# Altium PCB PCB_涂鸦CBU开发板_2021-05-29.pcbdoc
Units mil, origin at the board's own origin, x right, y up, seen from the top; angles counter-clockwise.
Board outline 3416.96 x 3968.5 mil, 2 copper layers (Top Layer, Bottom Layer); 20 components, 31 nets, 116 pads, 23 vias.
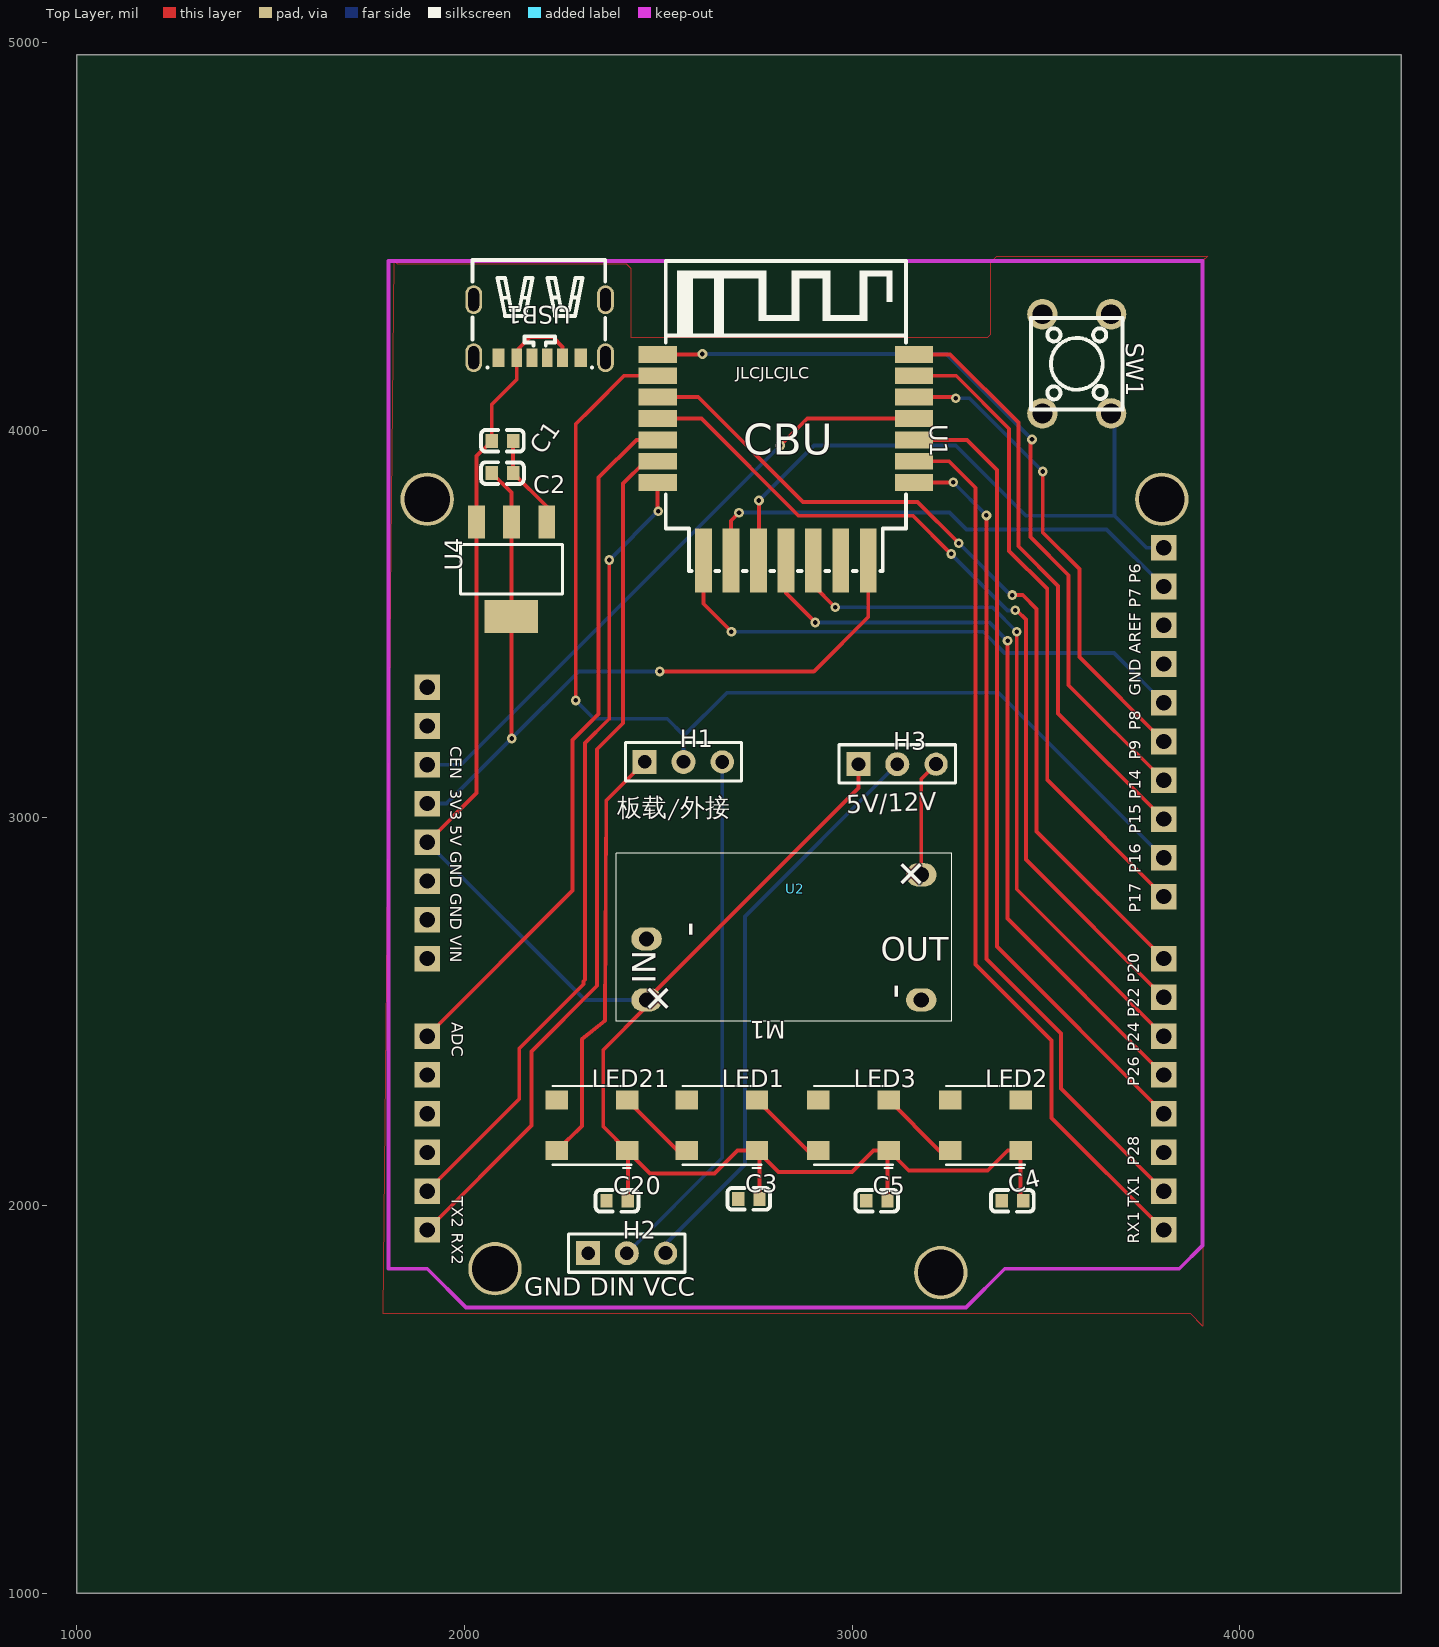
[diagram p0: Top Layer view]
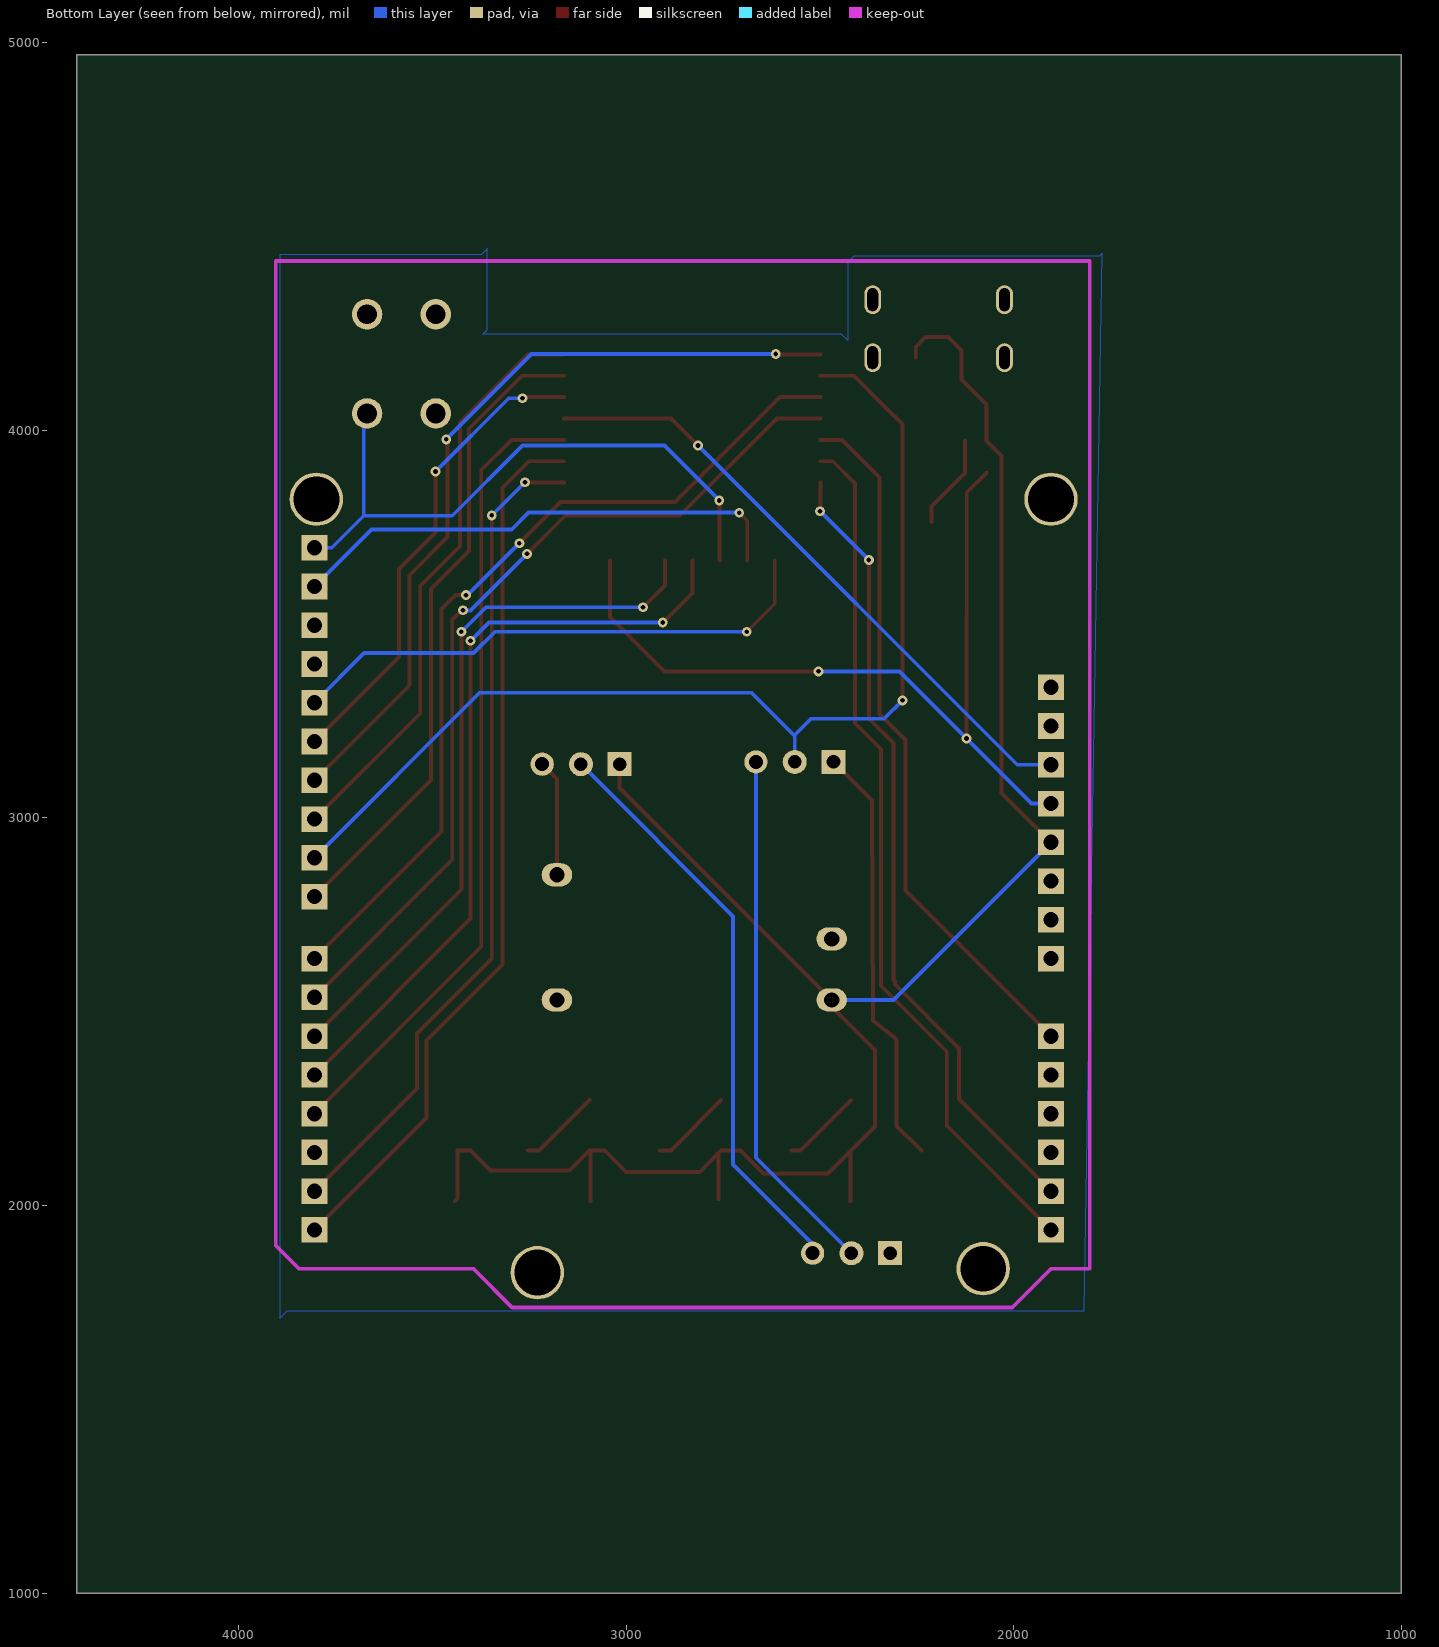
[diagram p1: Bottom Layer view, seen from below]

## Layer stack, top to bottom
Top Layer: signal copper (thickness not stored)
Dielectric: dielectric 12.6, FR-4, Dk 4.8
Bottom Layer: signal copper (thickness not stored)

## Board outline
4416.96,1000 1000,1000 1000,4968.5 4416.96,4968.5

## Components (designator, comment, footprint, x,y, rotation, side; value= is the part's Value field where it differs from the comment)
C1 "10uF" C0603 2098.06,3972.44 r0 top
C2 "10uF" C0603 2098.06,3889.76 r180 top
C3 "100nF" C0603 2733.85,2017.01 r0 top
C4 "100nF" C0603 3413.85,2012.01 r0 top
C5 "100nF" C0603 3063.85,2012.01 r0 top
C20 "100nF" C0603 2393.85,2012.01 r0 top
H1 "HDR-F-2.54_1x3" HDR-F-2.54_1X3 2564.99,3144.49 r0 top
H2 "HDR-F-2.54_1x3" HDR-F-2.54_1X3 2418.85,1877.01 r0 top
H3 "HDR-F-2.54_1x3" HDR-F-2.54_1X3 3116.56,3138.58 r0 top
LED1 "WS2812E" LED-SMD_4P-L5.0-W5.0-BR 2663.85,2207.01 r0 top
LED2 "WS2812E" LED-SMD_4P-L5.0-W5.0-BR 3343.85,2207.01 r0 top
LED3 "WS2812E" LED-SMD_4P-L5.0-W5.0-BR 3003.85,2207.01 r0 top
LED21 "WS2812E" LED-SMD_4P-L5.0-W5.0-BR 2328.85,2207.01 r0 top
M1 "升压模块" 升压3.7-5/8/9/12 2824.04,2691.74 r180 top
SW1 "YTSD001A0432501A" KEY-TH_4P-L6.0-W6.0-P4.50-LS6.50 3579.55,4171.26 r270 top
U1 "WIFI_BLE_CBU" CBU 2829.16,3931.89 r270 top
U2 "arduino" "ARDUINO 1.0.2" 1803.85,4437.01 r270 top
U4 "AMS1117-3.3_C165482" SOT-223_L6.5-W3.5-P2.30-LS7.0-BR 2121.68,3641.73 r90 top
USB1 "TYPE-C 6P" TYPE-C-SMD_TYPE-C-6P 2193.85,4262.01 r180 top
? "" ? 1634.15,2639.53 r0 top

## Footprints (in the part's own frame and the unit in brackets; to place one, negate y for a bottom-side part, rotate by r counter-clockwise, add the part's x,y. Pads: shape width x height; smd on the part's side, far side on the other; paste and mask are expansions set on the pad)
"ARDUINO 1.0.2" [mil]
  rect 66x66 hole 39.4: 3V(1400,100) 5V(1500,100) A0(2000,100) A1(2100,100) A2(2200,100) A3(2300,100) A4(2400,100) A5(2500,100) AREF(940,2000) D0(2500,2000) D1(2400,2000) D2(2300,2000) D3(2200,2000) D4(2100,2000) D5(2000,2000) D6(1900,2000) D7(1800,2000) D8(1640,2000) D9(1540,2000) D10(1440,2000) D11(1340,2000) D12(1240,2000) D13(1140,2000) GND(1040,2000) GND1(1700,100) GND2(1600,100) RESET(1300,100) SCL(740,2000) SDA(840,2000) VIN(1800,100) ""(1100,100) ""(1200,100)
  Keep-Out Layer lines w10: 2600,0 0,0 0,2100 2540,2100 2600,2040 2600,1590 2700,1490 2700,200 2600,100 2600,0
C0603 [mm]
  rect 0.8x0.9 smd: 1(-0.7,0) 2(0.7,0)
  silkscreen extent -1.4,-0.7 1.4,0.72
CBU [mm]
  rect 1.1x2.5 smd: 1(-6.7,-8.4) 2(-5.3,-8.4) 3(-3.9,-8.4) 4(-2.5,-8.4) 5(-1.1,-8.4) 6(0.3,-8.4) 7(1.7,-8.4) 15(1.7,8.4) 16(0.3,8.4) 17(-1.1,8.4) 18(-2.5,8.4) 19(-3.9,8.4) 20(-5.3,8.4) 21(-6.7,8.4)
  rect 4.2x1.1 smd: 8(6.8,-5.4) 9(6.8,-3.6) 10(6.8,-1.8) 11(6.8,0) 12(6.8,1.8) 13(6.8,3.6) 14(6.8,5.4)
  silkscreen extent -12.83,-7.87 7.49,7.87
HDR-F-2.54_1X3 [mil]
  rect 62x62 hole 35: 1(-100,0)
  round 62 hole 35: 2(0,0)
  round 60 hole 36: 3(100,0)
  silkscreen extent -150,-49 150,50
KEY-TH_4P-L6.0-W6.0-P4.50-LS6.50 [mm]
  round 2 hole 1.3: 1(-3.25,2.25) 2(3.25,2.25) 3(-3.25,-2.25) 4(3.25,-2.25)
  silkscreen extent -3,-3 3,3
LED-SMD_4P-L5.0-W5.0-BR [mm]
  rect 1.465x1.26 smd: 1(2.307,-1.65) 2(2.307,1.65) 3(-2.307,1.65) 4(-2.307,-1.65)
  silkscreen extent -2.58,-2.79 2.58,2.58
SOT-223_L6.5-W3.5-P2.30-LS7.0-BR [mil]
  rect 85x43 smd: 1(122,-90.5) 2(122,0.5) 3(122,90.5)
  rect 85x138 smd: 4(-122,0.5)
  silkscreen extent -64,-132 64,132
TYPE-C-SMD_TYPE-C-6P [mm]
  oval 1.1x1.9 hole 0.7 slot 1.5 at 90 deg: 7(-4.32,-1.9) 7(-4.32,1.9) 7(4.32,-1.9) 7(4.32,1.9)
  rect 0.7x1.2 smd: A5(-0.5,1.9) A9(1.5,1.9) B5(0.5,1.9) B9(-1.5,1.9)
  rect 0.8x1.2 smd: A12(2.7,1.9) B12(-2.7,1.9)
  silkscreen extent -4.3,-4.5 4.4,2.55
升压3.7-5/8/9/12 [mm]
  oval 2x1.524 hole 1: 1(9,0.1) 2(9,4.1) 3(-9,4.1) 4(-9,-4.1)
  silkscreen extent -11,-5.5 11,5.5
? [mil]

## Free pads (board coordinates)
  round 137.79 hole 118.11: 1(1903.85,3822.01) 1(2078.85,1837.01) 1(3228.85,1827.01) 1(3798.85,3822.01)

## Via types
v1: diameter 25.2, hole 12, Top Layer to Bottom Layer, 23 vias

## Nets (pads, with @x,y where several pads share a name; then routed paths per layer and width w, separated by ;. In a path a pad name is that pad's centre, name@x,y a point inside that pad or via, vN(x,y) a via of type N, cw(c..) or ccw(c..) an arc to the next point about the centre after c; other vN are vias at no path point)
3V3: C2.2 U1.14 U2.3V U4.2 U4.4 | length 2189.3
  Top Layer w10: C2.2 2121.19,3839.09 U4.2 U4.4 2121.68,3519.23 v1(2121.68,3204.72) ; v1(2503.57,3377.95) 2901.21,3377.95 2909.09,3385.82 3041.75,3518.49 U1.14
  Bottom Layer w10: U2.3V 1953.97,3037.01 v1(2121.68,3204.72) ; v1@2121.65,3204.71 2294.85,3377.91 v1@2503.55,3377.91
+5V: C1.1 C3.2 C4.2 C5.2 C20.2 H3.1 LED1.1 LED2.1 LED3.1 LED21.1 M1.2 U2.5V U4.3 USB1.A9 USB1.B9 | length 5240.1
  Top Layer w10: U2.5V 2031.18,3064.34 U4.3 2031.19,3933.12 C1.1 2070.5,4066.93 2134.79,4131.22 USB1.A9 2134.79,4206.02 2168.93,4240.16 2227.98,4240.16 2252.9,4215.23 USB1.B9 ; C20.2 2421.41,2140.34 LED21.1 ; C3.2 2761.41,2135.34 LED1.1 ; H3.1 3016.56,3077.17 M1.2 2469.72,2513.38 2357.9,2401.57 2357.9,2203.84 LED21.1 ; C5.2 3091.41,2138.76 LED3.1 ; C4.2 3434.7,2018.72 LED2.1 3401.53,2142.05 3350.03,2090.55 3146.2,2090.55 LED3.1 ; LED21.1 2479.07,2082.68 2645.31,2082.68 2704.68,2142.05 LED1.1 ; LED1.1 2810.13,2086.61 2999.64,2086.61 3055.07,2142.05 LED3.1
  Bottom Layer w10: U2.5V 2310.53,2530.32 M1.2
ADC: U1.5 U2.A0 | length 1816.8
  Top Layer w10: U2.A0 2279.16,2812.32 2279.16,3200.79 2346.09,3267.72 2346.09,3877.95 2443.34,3975.2 U1.5
C2_1: C1.2 C2.1 U4.1 | length 244.6
  Top Layer w10: C1.2 C2.1 2212.18,3803.2 U4.1
CEN: U1.18 U2.RESET | length 1626
  Top Layer w10: v1(2814.6,3960.63) 2884.29,4030.32 U1.18
  Bottom Layer w10: U2.RESET 1990.95,3137.01 v1(2814.6,3960.63)
GND: C3.1 C4.1 C5.1 C20.1 H2.1 LED1.3 LED2.3 LED3.3 LED21.3 M1.1 M1.3 SW1.3 U1.13 U2.GND U2.GND1 U2.GND2 USB1.7 USB1.A12 USB1.B12
H1_3: H1.3 H2.2 | length 1369.4
  Bottom Layer w10: H2.2 2664.99,2123.15 H1.3
H3_3: H3.3 M1.4 | length 301.2
  Top Layer w10: M1.4 3178.38,3100.4 H3.3
LED1_2: LED1.2 LED3.4 | length 212.1
  Top Layer w10: LED1.2 2884.62,2142.05 LED3.4
LED2_4: LED2.4 LED3.2 | length 212.1
  Top Layer w10: LED3.2 3224.62,2142.05 LED2.4
LED21_2: LED1.4 LED21.2 | length 207.1
  Top Layer w10: LED21.2 2549.62,2142.05 LED1.4
LED21_4: H1.1 LED21.4 | length 1100
  Top Layer w10: LED21.4 2302.79,2204.72 2302.75,2429.11 2362.95,2477.21 2365.75,3045.31 H1.1@2464.95,3144.51
P6: SW1.2 U1.10 U2.SCL | length 1634.9
  Top Layer w10: U1.10 2759.48,3665.36 v1(2759.48,3818.9)
  Bottom Layer w10: v1@2759.45,3818.91 2901.25,3960.61 3267.35,3960.61 3448.45,3779.51 3676.85,3779.51 ; SW1.2 3676.85,4034.59 3676.85,3779.51 ; U2.SCL 3759.35,3697.01 3676.85,3779.51
P7: U1.9 U2.SDA | length 1306.2
  Top Layer w10: U1.9 2687.45,3766.55 v1(2708.3,3787.4)
  Bottom Layer w10: v1(2708.3,3787.4) 3251.61,3787.4 3294.91,3744.09 3656.76,3744.09 U2.SDA
P8: U1.8 U2.D13 | length 1404.9
  Top Layer w10: U1.8@2616.55,3664.21 2616.55,3552.41 v1(2688.61,3480.31)
  Bottom Layer w10: v1(2688.61,3480.31) 3338.25,3480.31 3393.35,3425.21 3675.65,3425.21 U2.D13
P9: U1.19 U2.D12 | length 1237.3
  Top Layer w10: U1.19 3264.6,4085.43 v1(3267.35,4082.68) ; v1(3491.76,3893.7) 3491.76,3736.22 3586.25,3641.73 3586.25,3414.6 U2.D12
  Bottom Layer w10: v1(3267.35,4082.68) 3302.79,4082.68 v1(3491.76,3893.7)
P14: U1.1 U2.D11 | length 2080.9
  Top Layer w10: U1.1 2612.63,4195.67 v1(2613.81,4196.85) ; v1(3464.2,3976.38) 3460.26,3972.43 3460.26,3724.41 3558.69,3625.98 3558.69,3342.16 U2.D11
  Bottom Layer w10: v1(2613.81,4196.85) 3243.74,4196.85 v1(3464.2,3976.38)
P15: U1.21 U2.D10 | length 1519.8
  Top Layer w10: U1.21 3252.78,4195.67 3428.77,4019.68 3428.77,3700.79 3531.13,3598.42 3531.13,3269.72 U2.D10
P16: H1.2 U1.2 U2.D9 | length 2888.2
  Top Layer w10: v1(2287.04,3303.15) 2287.04,4015.75 2330.34,4059.05 2411.84,4140.55 U1.2
  Bottom Layer w10: v1(2287.04,3303.15) 2334.25,3255.91 2523.25,3255.91 2564.95,3214.21 2564.95,3144.51 2564.95,3211.01 2676.85,3322.81 3378.05,3322.81 U2.D9
P17: U1.20 U2.D8 | length 1673.9
  Top Layer w10: U1.20 3268.53,4140.55 3405.15,4003.94 3405.15,3688.97 3503.57,3590.55 3503.57,3097.28 U2.D8
P20: U1.3 U2.D7 | length 2241.7
  Top Layer w10: U1.3@2498.45,4085.41 2603.15,4085.41 2873.65,3814.91 3168.98,3814.91 v1(3275.23,3708.66) ; v1(3413.02,3574.8) 3440.26,3574.8 3476.05,3539.01 3476.05,2965.01 U2.D7
  Bottom Layer w10: v1(3275.23,3708.66) 3409.09,3574.8 v1(3413.02,3574.8)
P22: U1.4 U2.D6 | length 2286.8
  Top Layer w10: U1.4@2498.45,4030.31 2611.05,4030.31 2861.83,3779.53 3157.11,3779.53 v1(3255.54,3681.1) ; v1(3420.9,3535.43) 3424.84,3535.43 3448.46,3511.81 3448.46,2892.4 U2.D6
  Bottom Layer w10: v1(3255.54,3681.1) 3401.22,3535.43 v1(3420.9,3535.43)
P24: U1.12 U2.D5 | length 1839.1
  Top Layer w10: U1.12 2900.05,3599.61 v1(2956.33,3543.31) ; v1(3424.83,3480.31) 3424.83,2948.82 3424.83,2816.02 U2.D5
  Bottom Layer w10: v1(2956.33,3543.31) 3361.84,3543.31 v1(3424.83,3480.31)
P26: U1.11 U2.D4 | length 1993.7
  Top Layer w10: U1.11 2829.16,3579.92 v1(2905.15,3503.94) ; v1(3401.21,3456.69) 3401.21,2740.14 3401.28,2740.07 U2.D4
  Bottom Layer w10: v1(2905.15,3503.94) 3353.97,3503.94 v1(3401.21,3456.69)
P28: U1.17 U2.D3 | length 2084.4
  Top Layer w10: U1.17@3159.85,3975.21 3296.05,3975.21 3373.65,3897.61 3373.65,2668.21 U2.D3
RX1: U1.16 U2.D0 | length 2302.6
  Top Layer w10: U1.16 3250.03,3920.08 3318.53,3851.57 3318.53,2621.66 3514.59,2425.59 3514.59,2226.26 U2.D0
RX2: U1.6 U2.A5 | length 2247.8
  Top Layer w10: U2.A5 2172.86,2206.02 2172.86,2397.64 2342.16,2566.93 2342.16,3177.16 2409.09,3244.09 2409.09,3862.2 2466.96,3920.08 U1.6
S$68: 
TX1: U1.15 U2.D1 | length 2154.8
  Top Layer w10: U1.15@3159.85,3865.01 v1@3260.65,3865.71 ; v1(3346.48,3780.32) 3346.48,2638.59 3346.48,2636.22 3349.63,2633.07 3539,2443.7 3539,2301.85 U2.D1
  Bottom Layer w10: v1(3260.66,3865.75) 3261.05,3865.75 v1(3346.48,3780.32)
TX2: U1.7 U2.A4 | length 2075.2
  Top Layer w10: U2.A4 2141.35,2274.51 2141.35,2405.51 2306.75,2570.91 2306.75,2578.71 2310.65,2582.71 2310.65,3192.91 2369.75,3252.01 2373.65,3255.9 2373.65,3267.71 v1@2373.65,3665.31 ; U1.7 2498.45,3792.52 v1(2499.64,3791.34)
  Bottom Layer w10: v1(2373.65,3665.35) v1(2499.64,3791.34)
VCC: H2.3 H3.2 | length 1509.2
  Bottom Layer w10: H2.3 2518.85,1901.1 2724.05,2106.3 2724.05,2746.07 H3.2
pads on no net: LED2.2 SW1.1 SW1.4 U2. U2.A1 U2.A2 U2.A3 U2.AREF U2.D2 U2.VIN USB1.A5 USB1.B5

## Polygon pours and split planes (outlines as drawn)
GND on Top Layer (solid): 1818.53,4437.01 1826.41,4429.13 2416.96,4429.13 2428.77,4417.32 2428.77,4240.16 3350.03,4240.16 3357.91,4248.03 3357.91,4433.07 3373.65,4448.82 3916.96,4448.82 3905.15,4437.01 3905.15,1688.97 3873.65,1720.47 1790.97,1720.47
GND on Bottom Layer (solid): 1771.29,4456.69 1779.16,4448.82 2413.02,4448.82 2428.77,4433.07 2428.77,4232.28 2444.52,4248.03 3369.72,4248.03 3357.91,4259.84 3357.91,4468.5 3373.65,4452.76 3893.34,4452.76 3893.34,1708.66 3873.65,1728.34 1818.53,1728.34

## Silkscreen, mask and mechanical layers (free items; w line width, h text height)
Top Overlay:
  text "JLCJLCJLC" at 2700.42,4122.05 h51.18
  text "CEN  3V3 5V GND GND VIN" at 1952.39,3185.04 h51.18 r270
  text "5V/12V" at 2986.64,2996.07 h80 r2
  text "板载/外接" at 2394.52,2988.98 h80
  text "P17  P16  P15 P14  P9  P8   GND AREF P7 P6" at 3755.54,2755.9 h51.18 r90
  text "ADC                            TX2 RX2" at 1956.33,2472.44 h51.18 r270
  text "RX1 TX1  P28          P26 P24 P22 P20" at 3751.61,1901.57 h51.18 r90
  text "GND DIN VCC" at 2153.85,1752.01 h80

## Text inside footprints (layer, text, board x,y; h text height)
M1: Top Overlay "+" at 2556.89,2525.86 h80 r135; Top Overlay "+" at 3095.76,2863.45 h80 r315; Top Overlay "-" at 3084.05,2571.73 h80 r270; Top Overlay "-" at 2554.05,2731.73 h80 r270; Top Overlay "IN" at 2494.05,2571.73 h60 r90; Top Overlay "OUT" at 3074.05,2631.73 h60
U1: Top Overlay "CBU" at 2719.16,3936.89 h80